# Altium PCB ACT01_RS232 V3.0.PcbDoc
Units mm, origin at the board's own origin, x right, y up, seen from the top; angles counter-clockwise.
Board outline 35.65 x 27.4 mm, 2 copper layers (Top Layer, Bottom Layer), stack 0.325 mm thick; 38 components, 24 nets, 107 pads, 82 vias.
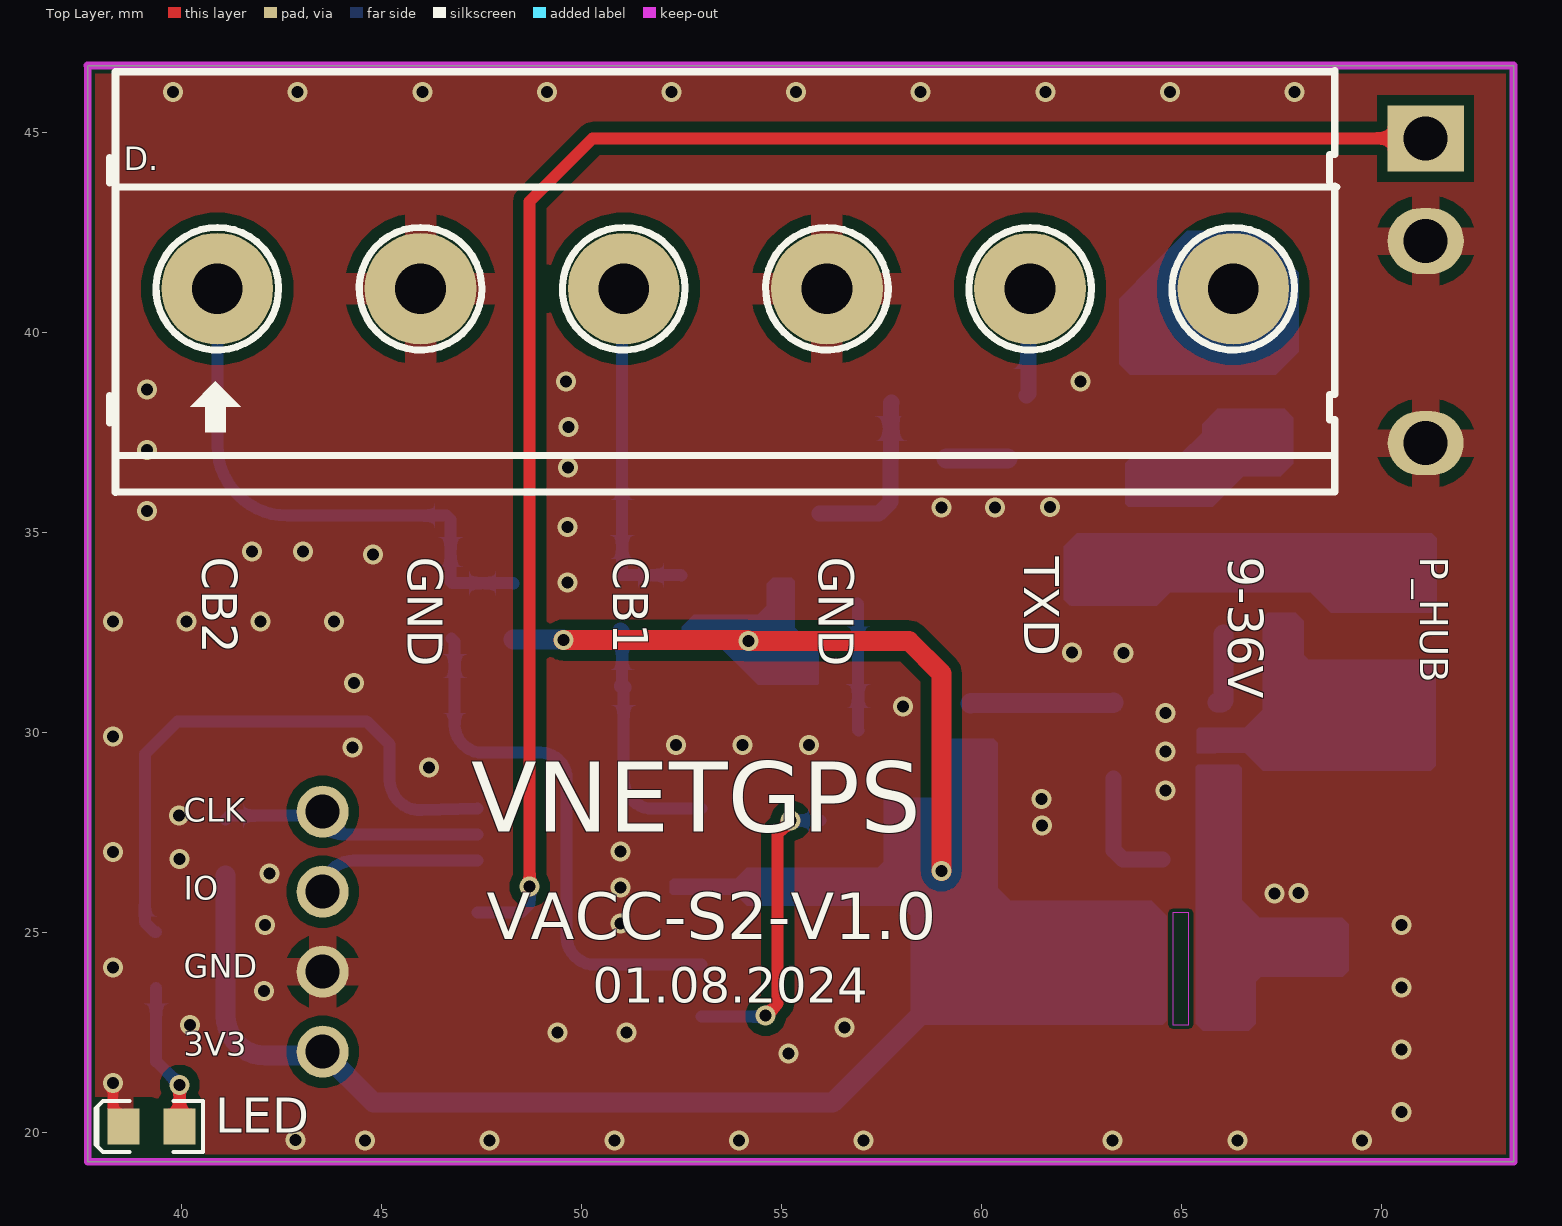
[diagram p0: Top Layer view]
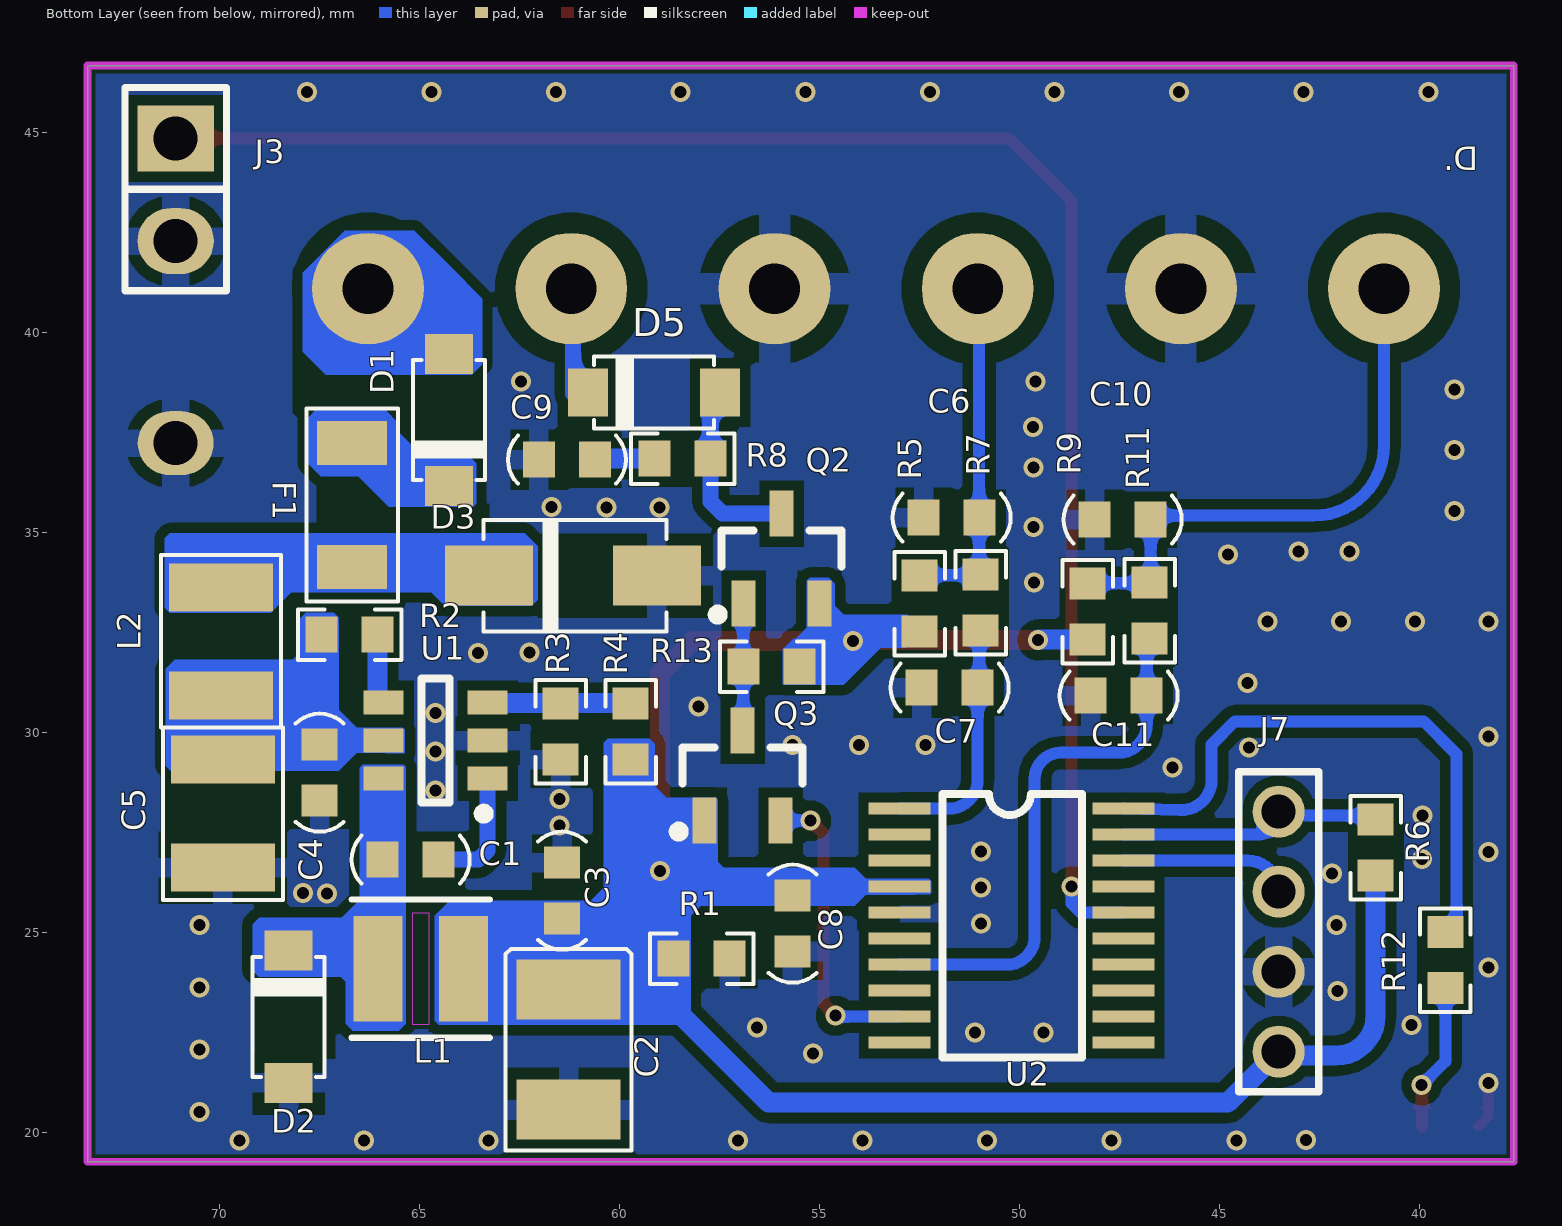
[diagram p1: Bottom Layer view, seen from below]

## Layer stack, top to bottom
Top Solder: solder mask 0.0102, Solder Resist, Dk 3.5
Top Layer: signal copper 0.0356
Dielectric 1: core 0.254, FR-4, Dk 4.2
Bottom Layer: signal copper 0.0356
Bottom Solder: solder mask 0.0102, Solder Resist, Dk 3.5

## Board outline
37.65,19.26 37.65,46.66 73.3,46.66 73.3,19.26

## Design rules (kind name [scope] priority, off if disabled: settings)
Clearance Clearance_1 [hASFootprint('KF128 - 6P')] p1: gap=0.254 ignorepadtopadclearanceinfootprint=FALSE except(0.5: Arc-THPad Track-THPad SMDPad-THPad THPad-THPad THPad-Via THPad-Fill THPad-Poly THPad-Region THPad-Text THPad-Hole)
Clearance KeepOut [OnLayer('Keep-Out Layer')] p2: gap=0.1 ignorepadtopadclearanceinfootprint=FALSE
Clearance Polygon [InNamedPolygon('BOT GND')or InNamedPolygon('TOP GND')] p3: gap=0.4 ignorepadtopadclearanceinfootprint=FALSE
Clearance [All] p4: gap=0.254 ignorepadtopadclearanceinfootprint=FALSE
MinimumSolderMaskSliver [All] p1: minsoldermaskwidth=0
PlaneConnect [All] p1: planeconnectstyle=Direct reliefexpansion=0.508 reliefentries=4 reliefconductorwidth=0.254 reliefairgap=0.254
PolygonConnect PolygonConnect_1 [HasFootprint('KF128 - 6P')] p1: thpad.connectstyle=Relief thpad.reliefconductorwidth=0.8 thpad.reliefentries=4 thpad.polygonreliefangle="90 Angle" thpad.airgapwidth=0.5 smdpad.connectstyle=Relief smdpad.reliefconductorwidth=0.254 smdpad.reliefentries=4 smdpad.polygonreliefangle="90 Angle" smdpad.airgapwidth=0.254 via.connectstyle=Relief via.reliefconductorwidth=0.254 via.reliefentries=4 via.polygonreliefangle="90 Angle" via.airgapwidth=0.254
PolygonConnect [All] p2: thpad.connectstyle=Relief thpad.reliefconductorwidth=0.7 thpad.reliefentries=4 thpad.polygonreliefangle="90 Angle" thpad.airgapwidth=0.3 smdpad.connectstyle=Relief smdpad.reliefconductorwidth=0.5 smdpad.reliefentries=4 smdpad.polygonreliefangle="90 Angle" smdpad.airgapwidth=0.3 via.connectstyle=Direct via.reliefconductorwidth=0.254 via.reliefentries=4 via.polygonreliefangle="90 Angle" via.airgapwidth=0.254
RoutingCorners [All] p1: cornerstyle=45-Degree minsetback=1.27 maxsetback=1.27
RoutingVias [All] p1: holewidth=0.3 width=0.5 viastyle="Through Hole" minholewidth=0.3 minwidth=0.5 maxholewidth=0.3 maxwidth=0.5
SMDNeckDown [All] p1: percent=100.000
SilkToSilkClearance [All] p1: silktosilkclearance=0
SilkToSolderMaskClearance [IsPad] p1: minsilkscreentomaskgap=0 clearancetoexposedcopper=TRUE
SolderMaskExpansion [All] p1: expansion=0.102 istentingtop=FALSE
UnRoutedNet [All] p1: checkbadconnections=TRUE
Width [All] p1: maxlimit=1.27 minlimit=0.203 preferedwidth=0.254
24 further rules are at their usual default settings.

## Components (designator, comment, footprint, x,y, rotation, side; value= is the part's Value field where it differs from the comment)
C1 "100nF" "0603 - C" 65.225,26.81 r0 bottom
C2 "107B" "3528 - TANTALUM" 61.275,22.06 r270 bottom value=100uF/6.3V
C3 "100nF" "0603 - C" 61.44,26.035 r270 bottom
C4 "100nF" "0603 - C" 67.5,28.985 r90 bottom
C5 "3.3uF/100V" "1210 - C" 69.92,27.96 r90 bottom
C6 "100nF" "0603 - C" 51.7,35.36 r180 bottom
C7 "100nF" "0603 - C" 51.75,31.11 r180 bottom
C8 "100nF" "0603 - C" 55.675,25.21 r90 bottom
C9 "100nF" "0603 - C" 61.32,36.81 r180 bottom
C10 "100nF" "0603 - C" 47.425,35.31 r180 bottom
C11 "100nF" "0603 - C" 47.525,30.91 r180 bottom
D1 "1N4148" SOD-123 64.27,37.8 r0 bottom
D2 "60V 2A" SOD-123 68.275,22.883 r180 bottom
D3 "SMAJ30A" "Diode - SMA" 61.17,33.91 r180 bottom
D5 "1N4148" SOD-123 59.14,38.49 r90 bottom
F1 "Fuse 30V" "1206 - Fuse" 66.69,35.68 r270 bottom
H1 "KF128-6P" "KF128 - 6P" 40.89,41.085 r0 top locked
J3 "Jumper 2" JP2 71.1,43.56 r270 bottom
J7 "Jumper 4" "JP4 2mm" 43.525,28.01 r270 bottom
L1 "SWPA3015S330MT" IND_3X3 64.975,24.085 r180 bottom
L2 "2.2uH" "1210 - L" 69.97,32.27 r270 bottom
LED "RED" "LED - 0603 - R" 39.24,20.14 r180 top (schematic designator D4)
Q2 "2N3906" SOT23B 55.95,34.335 r90 bottom
Q3 "2N3904" SOT23B 56.925,28.91 r90 bottom
R1 "3.3K" "0603 - R" 57.95,24.335 r0 bottom
R2 "1M" "0603 - R" 66.75,32.435 r0 bottom
R3 "15K" "0603 - R" 61.475,30.01 r270 bottom
R4 "47K" "0603 - R" 59.725,30.01 r270 bottom
R5 "10K" "0603 - R" 52.5,33.21 r270 bottom
R6 "10K" "0603 - R" 41.1,27.11 r270 bottom
R7 "10R" "0603 - R" 50.975,33.235 r270 bottom
R8 "10K" "0603 - R" 58.425,36.835 r180 bottom
R9 "10K" "0603 - R" 48.3,33.01 r270 bottom
R11 "10R" "0603 - R" 46.75,33.035 r270 bottom
R12 "3.3K" "0603 - R" 39.36,24.3 r90 bottom
R13 "1K" "0603 - R" 56.2,31.635 r180 bottom
U1 "HT7463A" SOT23-6_L 64.6,29.785 r0 bottom locked
U2 "STM32G030F6P6TR" TSSOP20 50.2,25.16 r180 bottom locked

## Footprints (in the part's own frame and the unit in brackets; to place one, negate y for a bottom-side part, rotate by r counter-clockwise, add the part's x,y. Pads: shape width x height; smd on the part's side, far side on the other; paste and mask are expansions set on the pad)
"0603 - C" [mm] "Chip Capacitor, Body 1.6x0.8mm, IPC High Density"
  rect 0.8x0.9 smd: 1(-0.7,0) 2(0.7,0)
  silkscreen extent -1.47,-0.6 1.47,0.6, body extent -0.8,-0.4 0.8,0.4, height 0.8
"0603 - R" [mm] "Chip Resistor, Body 1.6x0.8mm, IPC High Density"
  rect 0.8x0.9 smd paste-0.025: 1(-0.7,0) 2(0.7,0)
  silkscreen extent -1.3,-0.64 1.3,0.64, body extent -0.77,-0.42 0.78,0.43, height 0.45
"1206 - Fuse" [mm] "Chip Resetable Fuse,  Body 3.22x1.6mm, IPC High Density"
  rect 1.1x1.75 smd: 1(-1.55,0) 2(1.55,0)
  silkscreen extent -2.41,-1.14 2.41,1.14, body extent -1.6,-0.8 1.6,0.8, height 1
"1210 - C" [mm] "Chip Capacitor, Body 3.2x2.5mm, IPC High Density"
  rect 1.2x2.6 smd: 1(-1.35,0) 2(1.35,0)
  silkscreen extent -2.16,-1.5 2.16,1.5, body extent -1.6,-1.25 1.6,1.25, height 2.5
"1210 - L" [mm] "Chip Capacitor, Body 2.54x1.27mm, IPC High Density"
  rect 1.2x2.6 smd: 1(-1.35,0) 2(1.35,0)
  silkscreen extent -2.16,-1.5 2.16,1.5, body extent -1.6,-1.25 1.6,1.25, height 1.9
"3528 - TANTALUM" [mm] "Chip Inductor, Body 3.2x1.6mm, IPC High Density"
  rect 1.5x2.6 smd: 1(-1.5,0) 2(1.5,0)
  silkscreen extent -2.51,-1.57 2.51,1.57, body extent -1.78,-1.38 1.72,1.42, height 1.9
"Diode - SMA" [mm] "Diode; 2 Leads"
  rect 2.2x1.5 smd: 1(2.1,0) 2(-2.1,0)
  silkscreen extent -2.24,-1.4 2.34,1.4, body extent -2.67,-1.4 2.83,1.4, height 2.6
IND_3X3 [mil] "3x3x1.5mm"
  rect 48x104 smd paste+0 mask+0: 1(-42,0) 2(42,0)
  Keep-Out Layer region: -7.87,-55 -7.87,55 7.87,55 7.87,-55
  silkscreen extent -68,-68 68,68, body extent -63,-63 63,63, height 61
JP2 [mil] "Jumper 2, 2.54x2p"
  rect 65x75 hole 43.31: 1(-50.5,0)
  oval 65x75 hole 43.31: 2(50.5,0)
  silkscreen extent -101,-50 100,50
"JP4 2mm" [mm]
  round 1.3 hole 0.85: 1(0,0) 2(2,0) 3(4,0) 4(6,0)
  silkscreen extent -1,-1 7,1
"KF128 - 6P" [mil] "Header 3,pitch 5.08mm, Colour Green"
  round 110 hole 50: 1(0,0) 2(200,0) 3(400,0) 4(600,0) 5(800,0) 6(1000,0)
  silkscreen extent -106,-200 1102,215, body extent -114,-198 1101,216, height 563
"LED - 0603 - R" [mm] "Chip Capacitor, Body 1.6x0.8mm, IPC High Density"
  rect 0.8x0.9 smd: 1(-0.7,0) 2(0.7,0)
  silkscreen extent -1.3,-0.64 1.4,0.64, body extent -0.8,-0.4 0.8,0.4, height 0.6
SOD-123 [mm] "SOD123, 2-Leads, Body 2.6x1.6mm, Pitch 3.05mm, IPC High Density"
  rect 1.2x1 smd: 1(0,-1.652) 2(0,1.652)
  silkscreen extent -0.9,-1.5 0.9,1.5, body extent -0.8,-1.85 0.8,1.85, height 1.27
SOT23-6_L [mm] "SOT23, 6-Leads, Body 2.9x1.6mm, Pitch 0.95mm, Lead Span 2.7mm, IPC High Density"
  rect 1x0.6 smd paste-0.025: 1(-1.3,0.95) 2(-1.3,0) 3(-1.3,-0.95) 4(1.3,-0.95) 5(1.3,0) 6(1.3,0.95)
  silkscreen extent -1.32,-1.55 0.35,1.95, body extent -1.4,-1.45 1.4,1.45, height 1.45
SOT23B [mm] "SOT23, 3-Leads, Body 2.9x1.3mm, Pitch 0.95mm, Lead Span 2.4mm, IPC High Density"
  rect 1.15x0.6 smd: 1(-1.125,0.95) 2(-1.125,-0.95) 3(1.125,0)
  silkscreen extent -1.52,-1.5 0.7,1.73, body extent -1.25,-1.5 1.25,1.5, height 1.05
TSSOP20 [mm] "20-Lead, Body 4.4x6.4x6.5mm, IPC High Density"
  rect 1.55x0.3 smd: 1(-2.8,2.925) 2(-2.8,2.275) 3(-2.8,1.625) 4(-2.8,0.975) 5(-2.8,0.325) 6(-2.8,-0.325) 7(-2.8,-0.975) 8(-2.8,-1.625) 9(-2.8,-2.275) 10(-2.8,-2.925) 11(2.8,-2.925) 12(2.8,-2.275) 13(2.8,-1.625) 14(2.8,-0.975) 15(2.8,-0.325) 16(2.8,0.325) 17(2.8,0.975) 18(2.8,1.625) 19(2.8,2.275) 20(2.8,2.925)
  silkscreen extent -1.73,-3.3 1.75,3.3, body extent -3.27,-3.3 3.28,3.3, height 1.2

## Part data
C1 C3 C4 C6 C7 C8 C9 C10 C11: library part "Cap 0603 100nF", "CAP CER 100nF 50V C0G/NP0 0603", MFR=SAMSUNG, MPN=CL10C104JB8NNNC, Package=0603, Voltage=50V, Size="C0603: 100nF"
  C1 C3 C4 C6 C7 C10 C11: Company ID="VT_TỤ ĐIỆN_C0603 100nF"
  C8 C9: Company ID="VT_CAP_C0603 100nF"
C2: library part "Cap Tan 3528 100uF/6.3V", "CAP TANT 100UF 6.3V 10% 1411", MFR=Kemet, MPN=T491B107K006AT, Company ID="VT_CAP TAN 100uF 6.3V"
C5: library part "Cap 1210 3.3uF", "CAP CER 3.3UF 100V X7S 1210", MFR="TDK Corporation", MPN=C3225X7S2A335M200AB, MPN2=885012209071, Company ID="VT_CAP_C1210 3.3uF 100V", Size="C1210: 3.3uF/100V"
D1 D5: library part "Diode 1N4148", "DIODE GEN PURP 100V 300MA SOD123", MFR=DIODES, MPN=1N4148W-7-F, Company ID=VT_DIODE_1N4148W-7-F
D2: library part "Diode PMEG6020ER", "DIODE SCHOTTKY 60V 2A SOD123W", MFR=NXP, MPN=PMEG6020ER,115, Company ID=VT_DIODE_PMEG6020ER
D3: library part "Diode SMAJ30A", "TVS DIODE 30V 48.4V DO214AC", MFR="Littelfuse Inc.", Company ID="VT_DIODE_ SMAJ30A", MPN=SMAJ30A
F1: library part "Fuse 30V - 0.125A", "PTC RESET FUSE 30V 0.125A 1206", MFR=BrightKing, MPN=SMD1206B012TF, Company ID="VT_Fuse_30V - 0.125A"
H1: library part "HD KF128 6P", "6-Pin Plug-in Terminal Block Connector 5.08mm Pitch Through Hole", MFR=China, MPN="KF128 - 6P", Company ID="VT_CONN_KF128 6P"
J3: library part JP2, "Jumper 2, 2.54mmx2"
J7: library part JP4, "Jumper 4, 2.54mmx4"
L1: library part "Inductor 33uH", "FIXED IND 33UH 430MA 1.066OHM SM", MFR="Shenzhen Sunlord Electronics Co., Ltd.", Company ID=xx, MPN=SWPA3015S330MT
L2: library part "Inductor 3225 2.2uH", "FIXED IND 2.2UH 1.6A 76 MOHM SMD", MFR=Murata, MPN=LQH32PN2R2NN0, MPN2=SWPA3015S2R2NT, Company ID="VT_IND_3225 2.2uH", Size="L3225: 2.2uH"
LED: library part "LED 0603 RED", "LED RED CLEAR 0603 SMD", MFR=Everlight, MPN=QTLP601CRTR, Company ID="VT_LED_0603 RED", Size="LED 0603 - RED"
Q2: library part "Transistor 2N3906", "TRANS PNP 40V 0.2A SOT23", MFR=Fairchild, MPN=MMBT3906, Company ID=VT_TRANSISTOR_3906
Q3: library part "Transistor 2N3904", "TRANS NPN 40V 0.2A SOT-23", MFR=Fairchild, MPN=MMBT3904, Company ID=VT_TRANSISTOR_3904
R1 R12: library part "Res 0603 3.3K", "RES SMD 3.3K OHM 1% 1/10W 0603", MFR=Yageo, MPN=RC0603FR-073K3L, Company ID="VT_RES_R0603 3.3K", Size="R0603: 3.3K"
R2: library part "Res 0603 1M", "RES SMD 1M OHM 1% 1/10W 0603", MFR=Yageo, MPN=RC0603FR-071ML, Company ID="VT_ĐIỆN TRỞ_R0603 1M"
R3: library part "Res 0603 15K", "RES SMD 15K OHM 1% 1/10W 0603", MFR=Yageo, MPN=RC0603FR-0715KL, Company ID="VT_ĐIỆN TRỞ_R0603 15K", Size="R0603: 15K"
R4: library part "Res 0603 47K", "RES SMD 47K OHM 1% 1/10W 0603", MFR=Yageo, MPN=RE0603FRE0747KL, Company ID="VT_RES_R0603 47K", Size="R0603: 47K"
R5 R6 R8 R9: library part "Res 0603 10K", "RES SMD 10K OHM 1% 1/10W 0603", MFR=Yageo, MPN=RC0603FR-0710KL, Size="R0603: 10K"
  R5 R8 R9: Company ID="VT_RES_R0603 10K"
  R6: Company ID="VT_ĐIỆN TRỞ_R0603 10K"
R7 R11: library part "Res 0603 10R", "RES SMD 10 OHM 1% 1/10W 0603", MFR=Yageo, MPN=RC0603FR-0710RL, Company ID="VT_RES_R0603 10R", Size="R0603: 10R"
R13: library part "Res 0603 1K", "RES SMD 1K OHM 1% 1/10W 0603", MFR=Yageo, MPN=RC0603FR-071KL, Company ID="VT_ĐIỆN TRỞ_R0603 1K", Size="R0603: 1K"
U1: library part HT7463A/HT7463B, "52V/600mA, 1.25MHz/550kHz / Asynchronous Step Down Converter", MFR=Holtek, Company ID=VT_IC_HT7463A, MPN=HT7463A
U2: "IC MCU 32BIT 32KB FLASH 20TSSOP", MPN=STMicroelectronics, Company ID=VT_IC_STM32G030F6P6TR, MFR=STM32G030F6P6TR

## Free pads (board coordinates)
  oval 1.9x1.6 hole 1.1: 2(71.1,37.223)

## Via types
v1: diameter 0.5, hole 0.3, Top Layer to Bottom Layer, tented both sides, 82 vias

## Nets (pads, with @x,y where several pads share a name; then routed paths per layer and width w, separated by ;. In a path a pad name is that pad's centre, name@x,y a point inside that pad or via, vN(x,y) a via of type N, cw(c..) or ccw(c..) an arc to the next point about the centre after c; other vN are vias at no path point)
3V3: C2.1 C3.2 C8.2 J7.4 L1.2 Q2.2 Q3.1 R1.2 R4.2 R5.2 R6.2 R9.2 R13.2 U2.4 | length 39
  Top Layer w0.5: v1(49.54,32.3) 54.15,32.3 v1(54.17,32.28) 58.18,32.28 58.99,31.47 v1(58.99,26.53)
  Bottom Layer w0.5: R6.2 41.1,22.91 ccw(c42.1,22.91) 42.1,21.91 43.425,21.91 ccw(c43.425,22.01) J7.4 44.8,20.735 56.275,20.735 58.525,22.985 ; R9.2 49.53,32.31 v1(49.54,32.3)
CB_1: C6.2 H1.3 R5.1 R7.1 | length 8.7
  Bottom Layer w0.3: H1.3 51.013,41.047 51.013,33.972 R7.1 50.987,33.922 52.488,33.922 R5.1
CB_2: C10.2 H1.1 R9.1 R11.1 | length 13.9
  Bottom Layer w0.3: H1.1 40.89,37.17 ccw(c42.65,37.17) 41.174,36.211 ccw(c42.65,37.17) 41.691,35.694 ccw(c42.65,37.17) 42.65,35.41 46.625,35.41 C10.2 46.725,33.76 R11.1 46.762,33.722 48.288,33.722 R9.1
CB_ADC_1: C7.2 R7.2 U2.1 | length 6.1
  Bottom Layer w0.3: C7.2@51.013,31.148 R7.2@51.013,32.497 ; C7.2 51.05,28.81 ccw(c51.775,28.81) 51.25,28.31 ccw(c51.775,28.81) 51.275,28.285 ccw(c51.775,28.81) 51.775,28.085 U2.1
  Bottom Layer w0.4: R7.2 R7.2@51.013,32.497 ; C7.2@51.013,31.148 C7.2
CB_ADC_2: C11.2 R11.2 U2.7 | length 13.5
  Bottom Layer w0.3: R11.2 46.825,32.26 C11.2 46.825,30.185 ccw(c47.525,30.185) 47.525,29.485 48.975,29.485 cw(c48.975,28.835) 49.625,28.835 49.625,24.885 ccw(c50.325,24.885) 50.325,24.185 U2.7
GND: C2.2 C3.1 C4.1 C5.1 C6.1 C7.1 C8.1 C9.1 C10.1 C11.1 D2.1 D3.1 H1.2 H1.4 J3.2 J7.3 LED.2 pad.2 R1.1 R3.2 U1.2 U2.5 | length 1.2
  Top Layer w0.254: v1(38.28,21.23) 38.28,20.4 LED.2
  other v1: 42.84,19.8 44.585,19.79 47.7,19.79 50.815,19.79 53.93,19.79 57.045,19.79 63.275,19.79 66.39,19.79 69.505,19.79 70.5,20.5 55.17,21.97 70.5,22.06 49.4,22.49 51.12,22.49 56.57,22.61 40.21,22.68 42.06,23.53 70.5,23.62 38.28,24.115 42.08,25.18 70.5,25.18 50.97,25.21 67.32,25.96 67.92,25.98 50.97,26.115 42.19,26.46 39.94,26.83 38.28,27 50.97,27.02 61.51,27.67 39.93,27.92 61.5,28.33 64.6,28.546 46.18,29.12 64.6,29.514 44.27,29.616 52.36,29.68 54.02,29.68 55.68,29.68 38.28,29.885 64.6,30.482 58.028,30.639 44.31,31.23 62.26,31.99 63.54,31.98 38.28,32.77 40.123,32.77 41.967,32.77 43.81,32.77 49.64,33.74 44.787,34.438 41.76,34.52 43.03,34.52 49.65,35.13 39.13,35.53 59,35.61 60.33,35.62 61.71,35.63 49.66,36.62 39.13,37.05 49.67,37.63 39.13,38.57 49.61,38.771 62.47,38.77 39.785,46 42.9,46 46.015,46 49.13,46 52.245,46 55.36,46 58.475,46 61.59,46 64.705,46 67.82,46
LED: R12.2 U2.20 | length 14.8
  Bottom Layer w0.3: R12.2 39.33,25 39.08,25.25 39.08,29.45 39.9,30.27 44.62,30.27 45.2,29.69 45.2,28.812 ccw(c45.965,28.812) 46.008,28.048 U2.20
MCU_IN: J3.1 U2.16 | length 42
  Top Layer w0.3: v1(48.7,26.135) 48.7,43.268 50.275,44.843 J3.1
  Bottom Layer w0.3: U2.16 48.475,25.485 48.7,25.71 v1(48.7,26.135)
NetC1_1: C1.1 U1.1 | length 3.1
  Bottom Layer w0.4: U1.1 63.3,27.044 63.534,26.81 C1.1
NetC1_2: C1.2 D2.2 L1.1 U1.6
NetC9_2: C9.2 R8.1 | length 1.5
  Bottom Layer w0.5: R8.1 C9.2@60.65,36.835
NetD1_2: D1.2 F1.1
NetD3_2: D3.2 F1.2 L2.1
NetD4_1: LED.1 R12.1 | length 3.7
  Top Layer w0.3: LED.1 39.945,20.145 39.945,21.175 v1(39.95,21.18)
  Bottom Layer w0.3: R12.1 39.36,21.77 v1(39.95,21.18)
NetD5_1: D5.1 Q2.3 R8.2 | length 4.4
  Bottom Layer w0.4: Q2.3 57.425,35.46 57.725,35.76 R8.2 57.738,36.848 57.738,38.222 D5.1@57.75,38.235
NetQ2_1: Q2.1 Q3.3 R13.1 | length 3.2
  Bottom Layer w0.3: Q2.1 56.913,33.198 56.913,30.048 Q3.3
NetR2_1: R2.1 U1.4 | length 1.8
  Bottom Layer w0.5: U1.4 66,30.735 66.05,30.785 R2.1
NetR3_1: R3.1 R4.1 U1.3 | length 3.6
  Bottom Layer w0.5: R4.1 59.737,30.722 63.288,30.722 U1.3
SWCLK: J7.1 R6.1 U2.19 | length 6.7
  Bottom Layer w0.3: R6.1 41.2,27.91 43.425,27.91 J7.1 ccw(c44.1,28.01) 44.1,27.435 U2.19
SWDIO: J7.2 U2.18 | length 4.3
  Bottom Layer w0.3: J7.2 cw(c44.3,26.01) 44.3,26.785 U2.18
TXD: D5.2 H1.5 | length 2.7
  Bottom Layer w0.4: D5.2@61.122,38.42 61.166,38.464 61.166,41.041 H1.5
UART2_TX: Q3.2 U2.9 | length 7.5
  Top Layer w0.3: v1(54.6,22.91) 54.9,23.21 54.9,27.46 v1(55.225,27.785)
  Bottom Layer w0.3: U2.9 54.575,22.885 v1(54.6,22.91) ; v1(55.225,27.785) Q3.2
VIN: D1.1 H1.6
VIN_1: C4.2 C5.2 L2.2 R2.2 U1.5
pads on no net: U2.2 U2.3 U2.6 U2.8 U2.10 U2.11 U2.12 U2.13 U2.14 U2.15 U2.17

## Polygon pours and split planes (outlines as drawn)
GND on Top Layer "GND_L01_P000" (solid, remove dead copper, pour order 0): 37.65,19.26 73.3,19.26 73.3,46.66 37.65,46.66
GND on Bottom Layer "GND_L02_P001" (solid, remove dead copper, pour order 1): 37.65,19.26 73.3,19.26 73.3,46.66 37.65,46.66

## Keep-outs
Keep-Out Layer:
  the board outline again, w0.2

## Other copper
Bottom Layer:
  pour cut-out: 68.179,39.51 68.179,37.99 68.049,37.86 67.753,38.156 67.753,38.263
  pour cut-out: 71.474,28.456 71.474,27.474 71.23,27.23 68.92,27.23 68.92,27.24 70.19,28.51
  pour cut-out: 63.416,35.71 63.26,35.71 63.26,35.04 63.416,35.04
  pour cut-out: 68.416,32.766 68.416,32.898 71.524,32.898 71.524,31.87 68.44,31.87
  pour cut-out: 60.47,34.96 62.05,34.96 62.05,32.86 60.47,32.86
  pour cut-out: 65.59,35.09 65.78,35.09 65.78,35.64 67.04,35.64 67.04,36.161 67.579,36.161 67.579,35.14 66.81,35.14 66.81,34.97
  pour cut-out: 63.416,36.903 65.08,36.903 65.08,38.858 63.416,38.858
  region net NetD3_2: 62.22,33.16 64.37,33.16 64.71,33.5 68.21,33.5 68.72,32.99 71.25,32.99 71.37,33.11 71.37,34.85 71.25,34.97 62.37,34.97 62.05,34.65 62.05,33.31 62.19,33.17
  region net NetD1_2: 65.78,35.64 66.54,36.4 67.48,36.4 67.79,36.71 67.79,37.86 67.57,38.08 65.89,38.08 65.51,37.7 65.51,37.49 64.94,36.92 63.79,36.92 63.59,36.72 63.59,35.71 63.66,35.64
  region net VIN: 67.35,38.94 67.92,39.51 67.92,41.49 66.87,42.54 65.14,42.54 64.28,41.68 63.44,40.84 63.44,39.2 63.7,38.94
  pour cut-out: 69.124,21.83 67.109,21.83 67.109,23.885 69.124,23.885
  region net 3V3: 52.858,32.11 53.475,32.11 54.4,31.185 55.9,31.185 55.925,31.21 55.925,32.078 55.664,32.339 55.596,32.339 55.325,32.61 55.325,33.785 55.25,33.86 54.775,33.86 54.625,33.71 54.625,33.16 54.4,32.935 52.8,32.935 52.5,32.635 52.5,32.379
  region net 3V3: 52.605,25.935 52.249,25.935 52.206,25.978 52.206,26.266 52.275,26.335 53.85,26.335 54.125,26.61 57.4,26.61 57.55,26.76 57.55,28.31 57.6,28.36 58.825,28.36 59.125,28.66 59.125,29.71 59.25,29.835 60.3,29.835 60.4,29.735 60.4,26.11 60.725,25.785 64.25,25.785 64.625,25.41 64.625,22.785 64.525,22.685 58.45,22.685 58.225,22.91 58.225,25.41 57.975,25.66 54.125,25.66 53.85,25.935
  region net NetC1_2: 65.35,22.71 65.525,22.535 66.675,22.535 66.85,22.71 66.85,23.76 66.975,23.885 69.025,23.885 69.175,24.035 69.175,25.195 69.01,25.36 66.95,25.36 66.5,25.81 66.5,29.11 66.425,29.185 65.4,29.185 65.35,29.135
  region net VIN_1: 66.3,29.485 66.575,29.485 67.025,29.035 71.225,29.035 71.35,29.16 71.35,31.585 71.125,31.81 68.175,31.81 68.05,31.935 68.05,32.785 67.85,32.985 67.15,32.985 67.025,32.86 67.025,30.56 66.575,30.11 65.425,30.11 65.375,30.06 65.375,29.485 65.4,29.46

## Silkscreen, mask and mechanical layers (free items; w line width, h text height)
Top Overlay:
  text "D." at 38.546,43.85 h1
  text "CB2" at 40.222,34.383 h1.5 r270
  text "GND" at 45.359,34.383 h1.5 r270
  text "CB1" at 50.498,34.383 h1.5 r270
  text "GND" at 55.636,34.383 h1.5 r270
  text "TXD" at 60.775,34.383 h1.5 r270
  text "9-36V" at 65.878,34.383 h1.5 r270
  text "P_HUB" at 70.732,34.383 h1.2 r270
  text "CLK" at 40.05,27.56 h1
  text "VNETGPS" at 47.242,26.936 h3
  text "IO" at 40.05,25.607 h1
  text "VACC-S2-V1.0" at 47.627,24.432 h2
  text "GND" at 40.05,23.653 h1
  text "01.08.2024" at 50.273,22.947 h1.5
  text "3V3" at 40.05,21.71 h1
Bottom Overlay:
  text "D." at 38.54,43.85 h1